# Altium PCB PCB.PcbDoc
Units mm, origin at the board's own origin, x right, y up, seen from the top; angles counter-clockwise.
Board outline 366.78 x 253.36 mm, 2 copper layers (Top Layer, Bottom Layer); 28 components, 0 nets, 187 pads, 3 vias.
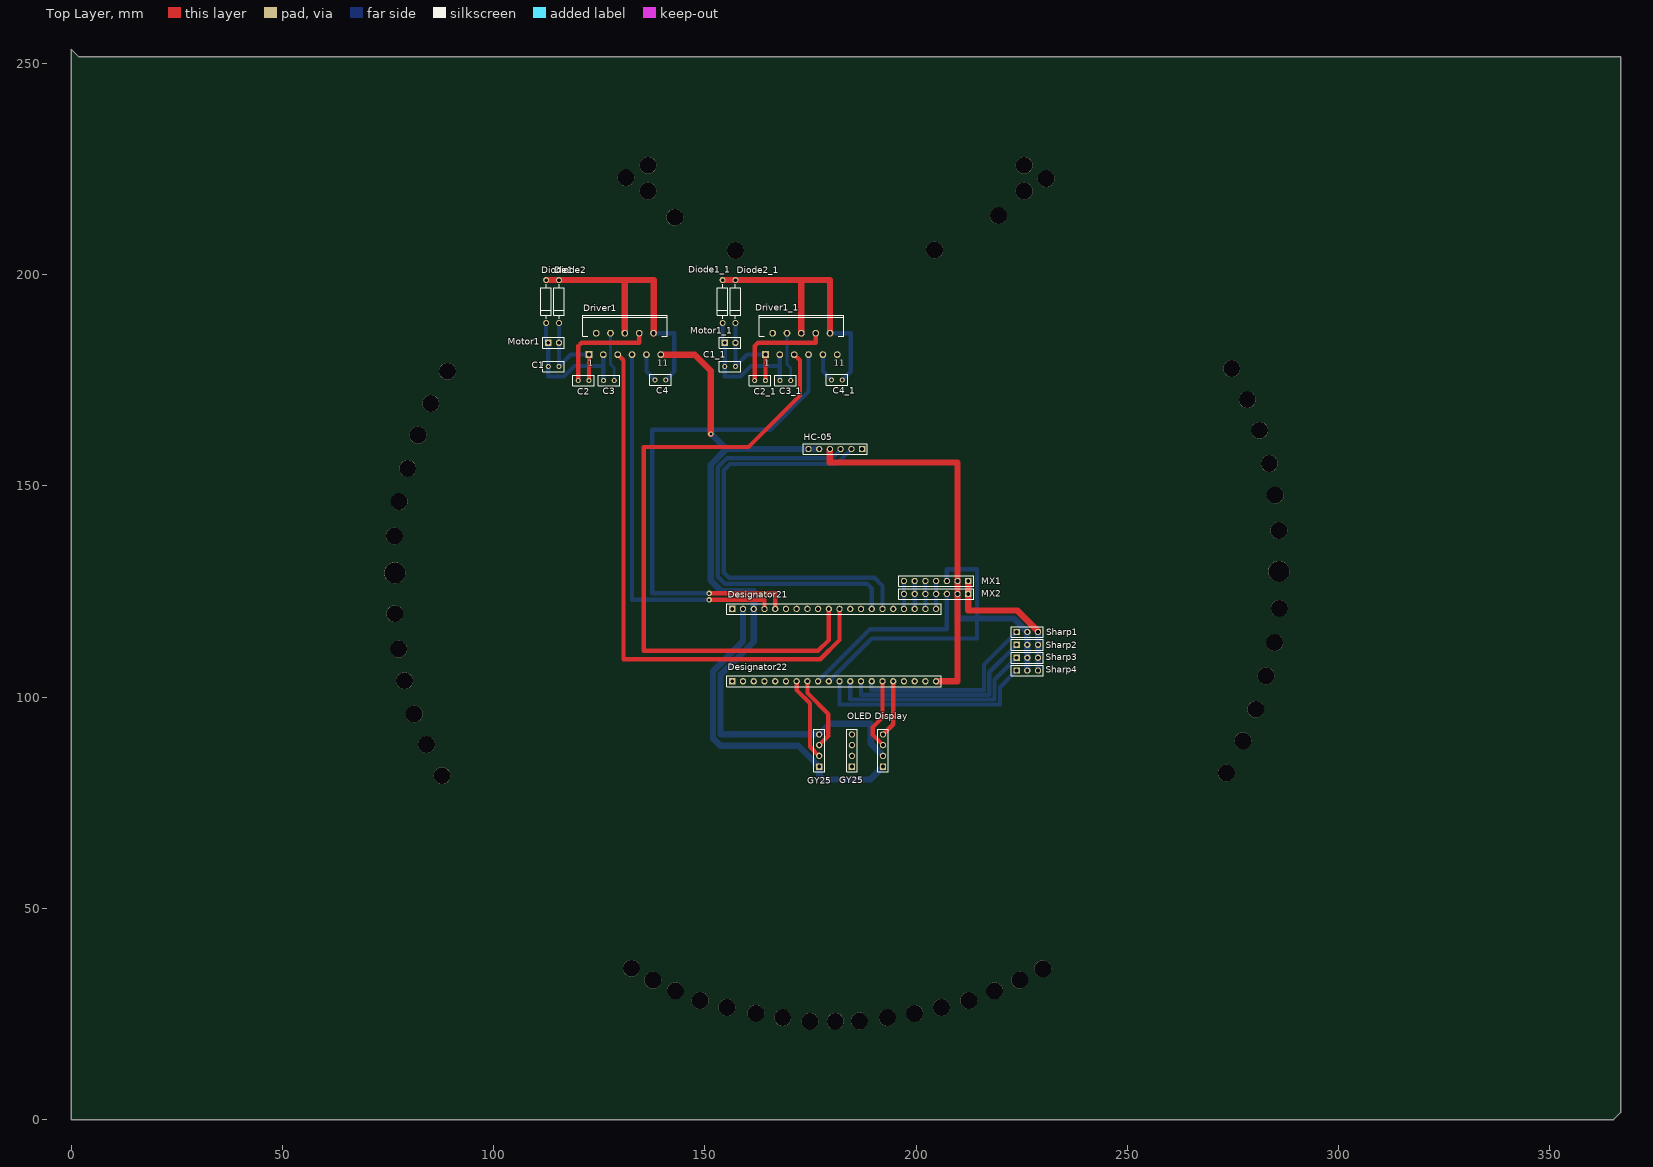
[diagram p0: Top Layer view]
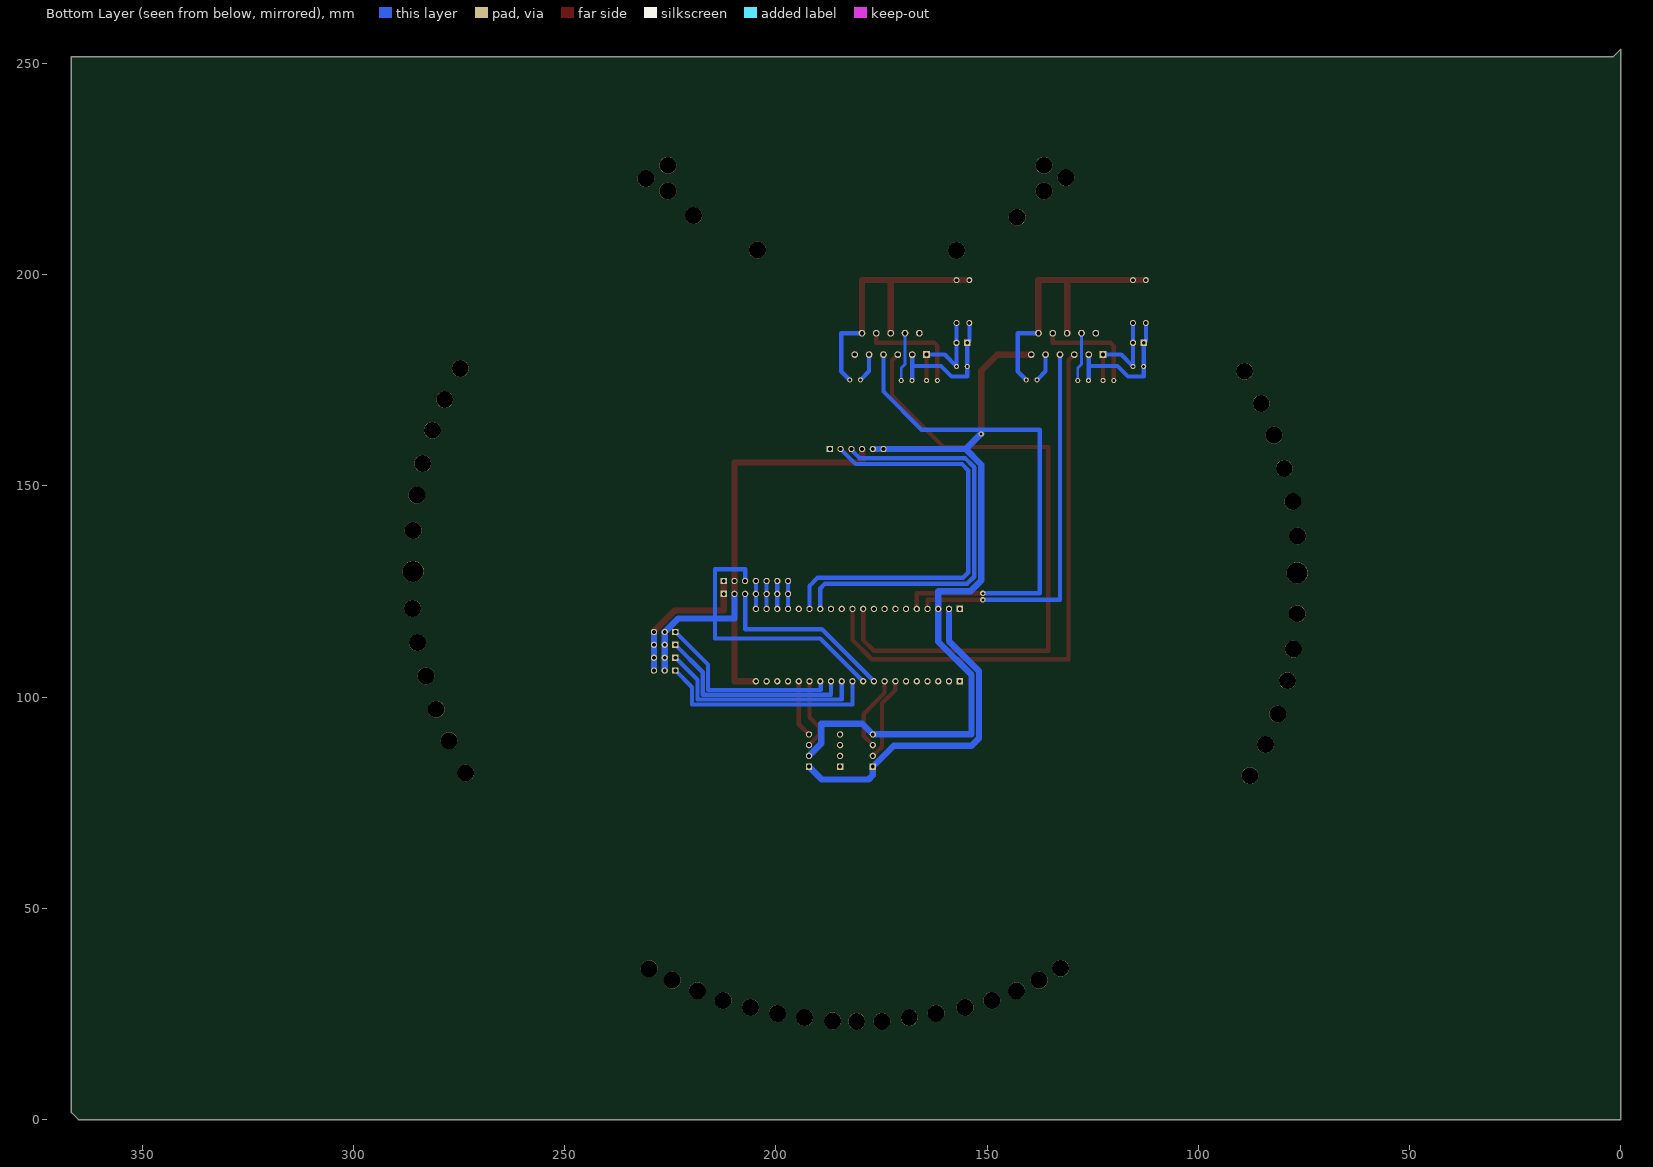
[diagram p1: Bottom Layer view, seen from below]

## Layer stack, top to bottom
Top Solder: solder mask 0.0102, Solder Resist, Dk 3.5
Top Layer: signal copper 0.0356
Dielectric 1: dielectric 0.32, FR-4, Dk 4.8
Bottom Layer: signal copper 0.0356
Bottom Solder: solder mask 0.0102, Solder Resist, Dk 3.5

## Board outline
0,0 365.125,0 366.776,1.651 366.776,251.587 1.778,251.587 0,253.365

## Design rules (kind name [scope] priority, off if disabled: settings)
Clearance [All] p1: gap=0.1 ignorepadtopadclearanceinfootprint=FALSE
PolygonConnect [All] p1: connectstyle=Relief reliefconductorwidth=0.254 reliefentries=4 polygonreliefangle="90 Angle" airgapwidth=0.254
RoutingVias [All] p1: holewidth=0.711 width=1.27 viastyle="Through Hole" minholewidth=0.711 minwidth=1.27 maxholewidth=0.711 maxwidth=1.27
SolderMaskExpansion [All] p1: expansion=0.102
Width Width_1 [(InNet('gnd') OR InNet('vcc') OR InNet('vss'))] p1: maxlimit=2 minlimit=0.1 preferedwidth=1.6
Width [All] p2: maxlimit=2 minlimit=0.1 preferedwidth=1
30 further rules are at their usual default settings.

## Components (designator, comment, footprint, x,y, rotation, side; value= is the part's Value field where it differs from the comment)
C1 "Comment" RAD-0.1 114.173,178.308 r0 top
C1_1 "Comment" RAD-0.1 155.956,178.308 r0 top
C2 "Comment" RAD-0.1 121.265,174.986 r0 top
C2_1 "Comment" RAD-0.1 163.048,174.986 r0 top
C3 "Comment" RAD-0.1 127.254,174.986 r0 top
C3_1 "Comment" RAD-0.1 169.037,174.986 r0 top
C4 "Comment" RAD-0.1 139.446,175.133 r0 top
C4_1 "Comment" RAD-0.1 181.229,175.133 r0 top
Designator21 "Comment" HDR1X20#1 156.464,120.904 r0 top
Designator22 "Comment" HDR1X20#2 156.464,103.759 r0 top
Diode1 "Comment" DIODE-0.4 112.395,193.675 r270 top
Diode1_1 "Comment" DIODE-0.4 154.178,193.675 r270 top
Diode2 "Comment" DIODE-0.4 115.443,193.675 r270 top
Diode2_1 "Comment" DIODE-0.4 157.226,193.675 r270 top
Driver1 "Comment" Multiwatt11 131.035,183.642 r0 top
Driver1_1 "Comment" Multiwatt11 172.818,183.642 r0 top
GY25 "Comment" HDR1X4#1 184.785,83.566 r90 top
GY25 "Comment" HDR1X4#2 177.038,83.566 r90 top
HC-05 "Comment" HDR1X6 187.198,158.75 r180 top
Motor1 "Comment" HDR1X2 112.903,183.896 r0 top
Motor1_1 "Comment" HDR1X2 154.686,183.896 r0 top
MX1 "Comment" HDR1X7 212.344,127.508 r180 top
MX2 "Comment" HDR1X7 212.344,124.46 r180 top
"OLED Display" "Comment" HDR1X4#3 192.151,83.566 r90 top
Sharp1 "Comment" HDR1X3 223.774,115.443 r0 top
Sharp2 "Comment" HDR1X3 223.774,112.395 r0 top
Sharp3 "Comment" HDR1X3 223.774,109.347 r0 top
Sharp4 "Comment" HDR1X3 223.774,106.299 r0 top

## Footprints (in the part's own frame and the unit in brackets; to place one, negate y for a bottom-side part, rotate by r counter-clockwise, add the part's x,y. Pads: shape width x height; smd on the part's side, far side on the other; paste and mask are expansions set on the pad)
DIODE-0.4 [mm] "Diode, Thru-Hole; 2 Leads; 0.4 in Pin Spacing"
  round 1.4 hole 0.85: 1(-5.08,0) 2(5.08,0)
  silkscreen extent -4.06,-1.27 4.06,1.27
HDR1X2 [mm] "Connector; Header; 2 Position"
  rect 1.5x1.5 hole 0.9: 1(0,0)
  round 1.5 hole 0.9: 2(2.54,0)
  silkscreen extent -1.27,-1.27 3.81,1.27
HDR1X3 [mm] "Connector; Header; 3 Position"
  rect 1.5x1.5 hole 0.9: 1(0,0)
  round 1.5 hole 0.9: GND(2.54,0) VCC(5.08,0)
  silkscreen extent -1.27,-1.27 6.35,1.27
HDR1X4#1 [mm] "Connector; Header; 4 Position"
  rect 1.5x1.5 hole 0.9: 1(0,0)
  round 1.5 hole 0.9: 2(2.54,0) 3(5.08,0) 4(7.62,0)
  silkscreen extent -1.27,-1.27 8.89,1.27
HDR1X4#2 [mm] "Connector; Header; 4 Position"
  rect 1.5x1.5 hole 0.9: GND(0,0)
  round 1.5 hole 0.9: RX(5.08,0) TX(2.54,0) VCC(7.62,0)
  silkscreen extent -1.27,-1.27 8.89,1.27
HDR1X4#3 [mm] "Connector; Header; 4 Position"
  rect 1.5x1.5 hole 0.9: GND(0,0)
  round 1.5 hole 0.9: SCL(5.08,0) SDA(7.62,0) VCC(2.54,0)
  silkscreen extent -1.27,-1.27 8.89,1.27
HDR1X6 [mm] "Connector; Header; 6 Position"
  rect 1.5x1.5 hole 0.9: 1(0,0)
  round 1.5 hole 0.9: GND(7.62,0) RX(5.08,0) TX(2.54,0) VCC(10.16,0) VCC(12.7,0)
  silkscreen extent -1.27,-1.27 13.97,1.27
HDR1X7 [mm] "Connector; Header; 7 Position"
  rect 1.5x1.5 hole 0.9: 1(0,0)
  round 1.5 hole 0.9: 2(2.54,0) 3(5.08,0) 4(7.62,0) 5(10.16,0) 6(12.7,0) 7(15.24,0)
  silkscreen extent -1.27,-1.27 16.51,1.27
HDR1X20#1 [mm] "Connector; Header; 20 Position"
  rect 1.5x1.5 hole 0.9: 3.3v(0,0)
  round 1.5 hole 0.9: 5v(5.08,0) GND(2.54,0) PA8(38.1,0) PA9(35.56,0) PA10(33.02,0) PA11(30.48,0) PA12(27.94,0) PA15(25.4,0) PB3(22.86,0) PB4(20.32,0) PB5(17.78,0) PB6(15.24,0) PB7(12.7,0) PB8(10.16,0) PB9(7.62,0) PB12(48.26,0) PB13(45.72,0) PB14(43.18,0) PB15(40.64,0)
  silkscreen extent -1.27,-1.27 49.53,1.27
HDR1X20#2 [mm] "Connector; Header; 20 Position"
  round 1.5 hole 0.9: 3.3v(43.18,0) GND(45.72,0) GND(48.26,0) NRST(40.64,0) PA0(10.16,0) PA1(12.7,0) PA2(15.24,0) PA3(17.78,0) PA4(20.32,0) PA5(22.86,0) PA6(25.4,0) PA7(27.94,0) PB0(30.48,0) PB1(33.02,0) PB10(35.56,0) PB11(38.1,0) PC13(2.54,0) PC14(5.08,0) PC15(7.62,0)
  rect 1.5x1.5 hole 0.9: VBAT(0,0)
  silkscreen extent -1.27,-1.27 49.53,1.27
Multiwatt11 [mm] "TO, Thru-Hole, Vertical, Heatsink Mounted; 11 Bent Staggered Leads; Pitch 1.7 mm"
  rect 1.6x1.6 hole 1: 1(-8.5,-2.54)
  round 1.6 hole 1: 2(-6.8,2.54) 3(-5.1,-2.54) 4(-3.4,2.54) 5(-1.7,-2.54) 6(0,2.54) 7(1.7,-2.54) 8(3.4,2.54) 9(5.1,-2.54) 10(6.8,2.54) 11(8.5,-2.54)
  silkscreen extent -10,1.83 10,6.83
RAD-0.1 [mm] "Radial Cap, Thru-Hole; 2 Leads; 0.1 in Pin Spacing"
  round 1.2 hole 0.7: 1(-1.27,0) 2(1.27,0)
  silkscreen extent -2.54,-1.27 2.54,1.27

## Free pads (board coordinates)
  round 4 hole 4: 11(77.597,146.304) 11(284.861,112.903) 13(218.567,30.48) 14(193.167,24.13) 15(168.402,24.13) 16(143.002,30.48) 21(131.318,223.012) 21(230.759,222.758) 22(77.47,111.379) 22(284.988,147.828) 23(87.757,81.407) 23(274.701,177.8) 83(79.629,154.178) 83(282.829,105.029) 85(136.525,225.933) 85(225.552,219.837) 88(85.09,169.545) 88(89.027,177.165) 88(273.431,82.042) 88(277.368,89.662) 89(136.525,219.837) 89(142.875,213.614) 89(157.226,205.74) 89(204.343,205.867) 89(219.456,213.995) 89(225.552,225.933) 91(180.848,23.241) 92(205.994,26.543) 93(132.588,35.814) 93(229.997,35.687) 94(155.194,26.543) 98(81.153,96.012) 98(281.305,163.195) 102(174.879,23.241) 103(186.563,23.368) 104(199.644,25.146) 105(212.471,28.194) 106(162.052,25.146) 107(148.844,28.194) 108(137.668,33.02) 109(224.536,33.02) 110(76.454,138.176) 110(286.004,121.031) 119(76.581,119.761) 119(285.877,139.446) 120(78.867,103.886) 120(283.591,155.321) 121(84.074,88.773) 121(278.384,170.434) 133(82.042,162.052) 133(280.416,97.155)
  round 5 hole 5: 82(76.581,129.413) 82(285.877,129.794)

## Via types
v1: diameter 1.27, hole 0.711, Top Layer to Bottom Layer, 3 vias

## Nets (pads, with @x,y where several pads share a name; then routed paths per layer and width w, separated by ;. In a path a pad name is that pad's centre, name@x,y a point inside that pad or via, vN(x,y) a via of type N, cw(c..) or ccw(c..) an arc to the next point about the centre after c; other vN are vias at no path point)
pads on no net: "OLED Display.GND" "OLED Display.SCL" "OLED Display.SDA" "OLED Display.VCC" C1.1 C1.2 C1_1.1 C1_1.2 C2.1 C2.2 C2_1.1 C2_1.2 C3.1 C3.2 C3_1.1 C3_1.2 C4.1 C4.2 C4_1.1 C4_1.2 Designator21.3.3v Designator21.5v Designator21.GND Designator21.PA8 Designator21.PA9 Designator21.PA10 Designator21.PA11 Designator21.PA12 Designator21.PA15 Designator21.PB3 Designator21.PB4 Designator21.PB5 Designator21.PB6 Designator21.PB7 Designator21.PB8 Designator21.PB9 Designator21.PB12 Designator21.PB13 Designator21.PB14 Designator21.PB15 Designator22.3.3v Designator22.GND Designator22.NRST Designator22.PA0 Designator22.PA1 Designator22.PA2 Designator22.PA3 Designator22.PA4 Designator22.PA5 Designator22.PA6 Designator22.PA7 Designator22.PB0 Designator22.PB1 Designator22.PB10 Designator22.PB11 Designator22.PC13 Designator22.PC14 Designator22.PC15 Designator22.VBAT Diode1.1 Diode1.2 Diode1_1.1 Diode1_1.2 Diode2.1 Diode2.2 Diode2_1.1 Diode2_1.2 Driver1.1 Driver1.2 Driver1.3 Driver1.4 Driver1.5 Driver1.6 Driver1.7 Driver1.8 Driver1.9 Driver1.10 Driver1.11 Driver1_1.1 Driver1_1.2 Driver1_1.3 Driver1_1.4 Driver1_1.5 Driver1_1.6 Driver1_1.7 Driver1_1.8 Driver1_1.9 Driver1_1.10 Driver1_1.11 GY25.1 GY25.2 GY25.3 GY25.4 GY25.GND GY25.RX GY25.TX GY25.VCC HC-05.1 HC-05.GND HC-05.RX HC-05.TX HC-05.VCC Motor1.1 Motor1.2 Motor1_1.1 Motor1_1.2 MX1.1 MX1.2 MX1.3 MX1.4 MX1.5 MX1.6 MX1.7 MX2.1 MX2.2 MX2.3 MX2.4 MX2.5 MX2.6 MX2.7 Sharp1.1 Sharp1.GND Sharp1.VCC Sharp2.1 Sharp2.GND Sharp2.VCC Sharp3.1 Sharp3.GND Sharp3.VCC Sharp4.1 Sharp4.GND Sharp4.VCC
copper on no net: | length 1858.4
  Top Layer w1: 120.015,175.006 120.015,183.154 120.757,183.896 134.435,183.896 134.435,186.182 ; 122.535,174.986 122.535,181.102 ; 129.335,181.102 130.683,179.754 130.683,108.966 177.292,108.966 181.864,113.538 181.864,120.904 ; v1@150.876,123.063 164.084,123.063 164.084,120.904 ; v1(151.003,124.587) 166.624,124.587 166.624,120.904 ; 161.798,175.006 161.798,183.154 162.54,183.896 176.218,183.896 176.218,186.182 ; 164.318,174.986 164.318,181.102 ; 171.118,181.102 172.466,179.754 172.466,171.45 160.274,159.258 135.509,159.258 135.509,110.998 176.784,110.998 179.324,113.538 179.324,120.904 ; 171.704,103.759 171.704,101.727 174.879,98.552 174.879,88.265 177.038,86.106 ; 174.244,103.759 174.244,100.965 179.197,96.012 179.197,90.805 177.038,88.646 ; 192.024,103.759 192.024,95.25 189.738,92.964 189.738,91.059 192.151,88.646 ; 192.151,91.186 194.564,93.599 194.564,103.759
  Top Layer w1.5: 112.395,198.755 115.443,198.755 137.835,198.755 137.835,186.182 ; 131.035,186.182 131.035,198.657 ; 139.535,181.102 147.574,181.102 151.384,177.292 v1(151.384,162.306) ; 154.178,198.755 157.226,198.755 179.618,198.755 179.618,186.182 ; 172.818,186.182 172.818,198.657 ; 179.578,158.75 179.578,155.575 209.804,155.575 209.804,127.508 209.804,103.759 204.724,103.759 ; 212.344,127.508 212.344,120.523 223.901,120.523 228.854,115.57 228.854,115.443
  Bottom Layer w0.7: 127.635,186.182 127.635,178.816 128.524,177.927 128.524,174.986 ; 169.418,186.182 169.418,178.816 170.307,177.927 170.307,174.986
  Bottom Layer w0.8: 189.357,120.904 189.484,120.904
  Bottom Layer w1: 112.395,188.595 112.395,184.404 112.903,183.896 112.903,178.308 112.903,175.895 116.586,175.895 119.126,178.435 125.935,178.435 ; 115.443,188.595 115.443,183.896 115.443,178.308 118.237,181.102 122.535,181.102 ; 125.935,175.035 125.935,181.102 ; 132.735,181.102 132.735,123.063 134.435,123.063 v1(151.003,123.063) ; 136.135,181.102 136.135,177.174 138.176,175.133 ; 137.835,186.182 142.748,186.182 142.748,177.165 140.716,175.133 ; v1(151.003,124.587) 137.541,124.587 137.541,163.322 165.501,163.322 174.518,172.339 174.518,181.102 ; 154.178,188.595 154.178,184.404 154.686,183.896 154.686,178.308 154.686,175.895 158.369,175.895 160.909,178.435 167.718,178.435 ; 157.226,188.595 157.226,183.896 157.226,178.308 160.02,181.102 164.318,181.102 ; 167.718,175.035 167.718,181.102 ; 176.784,103.759 189.103,116.078 207.264,116.078 207.264,124.46 ; 177.918,181.102 177.918,177.174 179.959,175.133 ; 179.324,103.759 189.484,113.919 207.001,113.919 214.376,113.919 214.376,130.302 207.264,130.302 207.264,127.508 ; 179.618,186.182 184.531,186.182 184.531,177.165 182.499,175.133 ; 181.864,103.759 181.864,98.298 219.837,98.298 219.837,102.362 223.774,106.299 ; 184.404,103.759 184.404,99.441 218.567,99.441 218.567,104.14 223.774,109.347 ; 184.658,158.75 181.102,155.194 155.956,155.194 154.432,153.67 154.432,129.54 155.702,128.27 190.119,128.27 192.024,126.365 192.024,120.777 ; 186.944,103.759 186.944,100.584 217.297,100.584 217.297,105.918 223.774,112.395 ; 189.484,103.759 189.357,103.759 189.357,101.727 216.027,101.727 216.027,107.696 223.774,115.443 ; 189.484,120.904 189.484,125.73 188.341,126.873 154.686,126.873 153.035,128.524 153.035,154.432 155.194,156.591 180.213,156.591 182.118,158.496 ; 197.104,120.904 197.104,124.46 197.104,127.508 ; 199.644,120.904 199.644,124.46 199.644,127.508 ; 202.184,120.904 202.184,124.46 202.184,127.508 ; 204.724,120.904 204.724,124.46 204.724,127.508 ; 182.118,158.496 182.118,158.75 182.118,158.496
  Bottom Layer w1.5: v1(151.384,162.306) 151.511,162.306 155.067,158.75 ; 159.004,120.904 159.004,113.284 151.892,106.172 151.892,90.297 153.67,88.519 172.085,88.519 177.038,83.566 177.038,81.534 178.054,80.518 189.103,80.518 192.151,83.566 ; 177.038,158.75 174.498,158.75 155.067,158.75 ; 192.151,86.106 189.23,89.027 189.23,93.726 179.578,93.726 177.038,91.186 153.67,91.186 153.67,105.283 161.544,113.157 161.544,120.904 161.544,125.095 153.924,125.095 151.384,127.635 151.384,155.067 155.067,158.75 ; 209.804,124.46 209.804,118.618 223.139,118.618 226.314,115.443 226.314,109.347 226.314,106.299 ; 228.854,106.299 228.854,112.395 228.854,115.443

## Silkscreen, mask and mechanical layers (free items; w line width, h text height)
Top Solder:
  circle w0.254: c180.848,129.286 r110
  lines w0.254: 67.818,129.286 180.848,129.286 302.641,129.286 ; 85.993,67.138 122.703,33.192 129.698,40.337 ; 86.06,67.206 93.055,74.352 129.765,40.405 ; 93.125,183.434 128.871,218.394 121.96,225.622 ; 93.153,183.405 86.242,190.632 121.987,225.593 ; 141.006,221.677 ccw(c180.856,261.527) 220.705,221.677 ; 141.011,221.742 141.011,231.742 ; 155.848,129.286 cw(c180.848,129.286) 205.848,129.286 ; 220.767,221.742 220.767,231.742 ; 231.994,218.141 268.704,184.195 275.7,191.34 ; 232.061,218.209 239.057,225.355 275.767,191.408 ; 239.582,32.952 275.327,67.912 268.416,75.14 ; 239.609,32.923 232.698,40.15 268.444,75.111 ; 315.465,227.666 352.175,193.72 359.17,200.865 ; 315.532,227.734 322.527,234.88 359.237,200.933 ; 326.517,7.62 362.263,42.58 355.352,49.808 ; 326.545,7.591 319.633,14.819 355.379,49.779 ; 333.82,210.693 340.816,217.839 ; 337.506,32.299 344.418,25.071

## Dimensions
322.453,161.036 to 322.707,5.207 on Top Solder
180.848,243.586 to 182.753,9.779 on Top Solder
354.344,195.936 to 356.831,198.476 on Top Solder
352.175,193.72 to 354.661,196.26 on Top Solder
322.527,234.88 to 320.041,232.34 on Top Solder
320.358,232.664 to 317.871,230.124 on Top Solder

## Text inside footprints (layer, text, board x,y; h text height)
Driver1: Top Overlay "11" at 138.705,178.427 h1.5; Top Overlay "1" at 122.305,178.427 h1.5
Driver1_1: Top Overlay "11" at 180.488,178.427 h1.5; Top Overlay "1" at 164.088,178.427 h1.5